# Altium PCB baicuoiki.PcbDoc (part 2 of 2)
Units mm, origin at the board's own origin, x right, y up, seen from the top; angles counter-clockwise.
Board outline 178.82 x 125.98 mm, 2 copper layers (Top Layer, Bottom Layer); 261 components, 166 nets, 718 pads, 50 vias.
Unrouted connection lines stored in the file: 3.
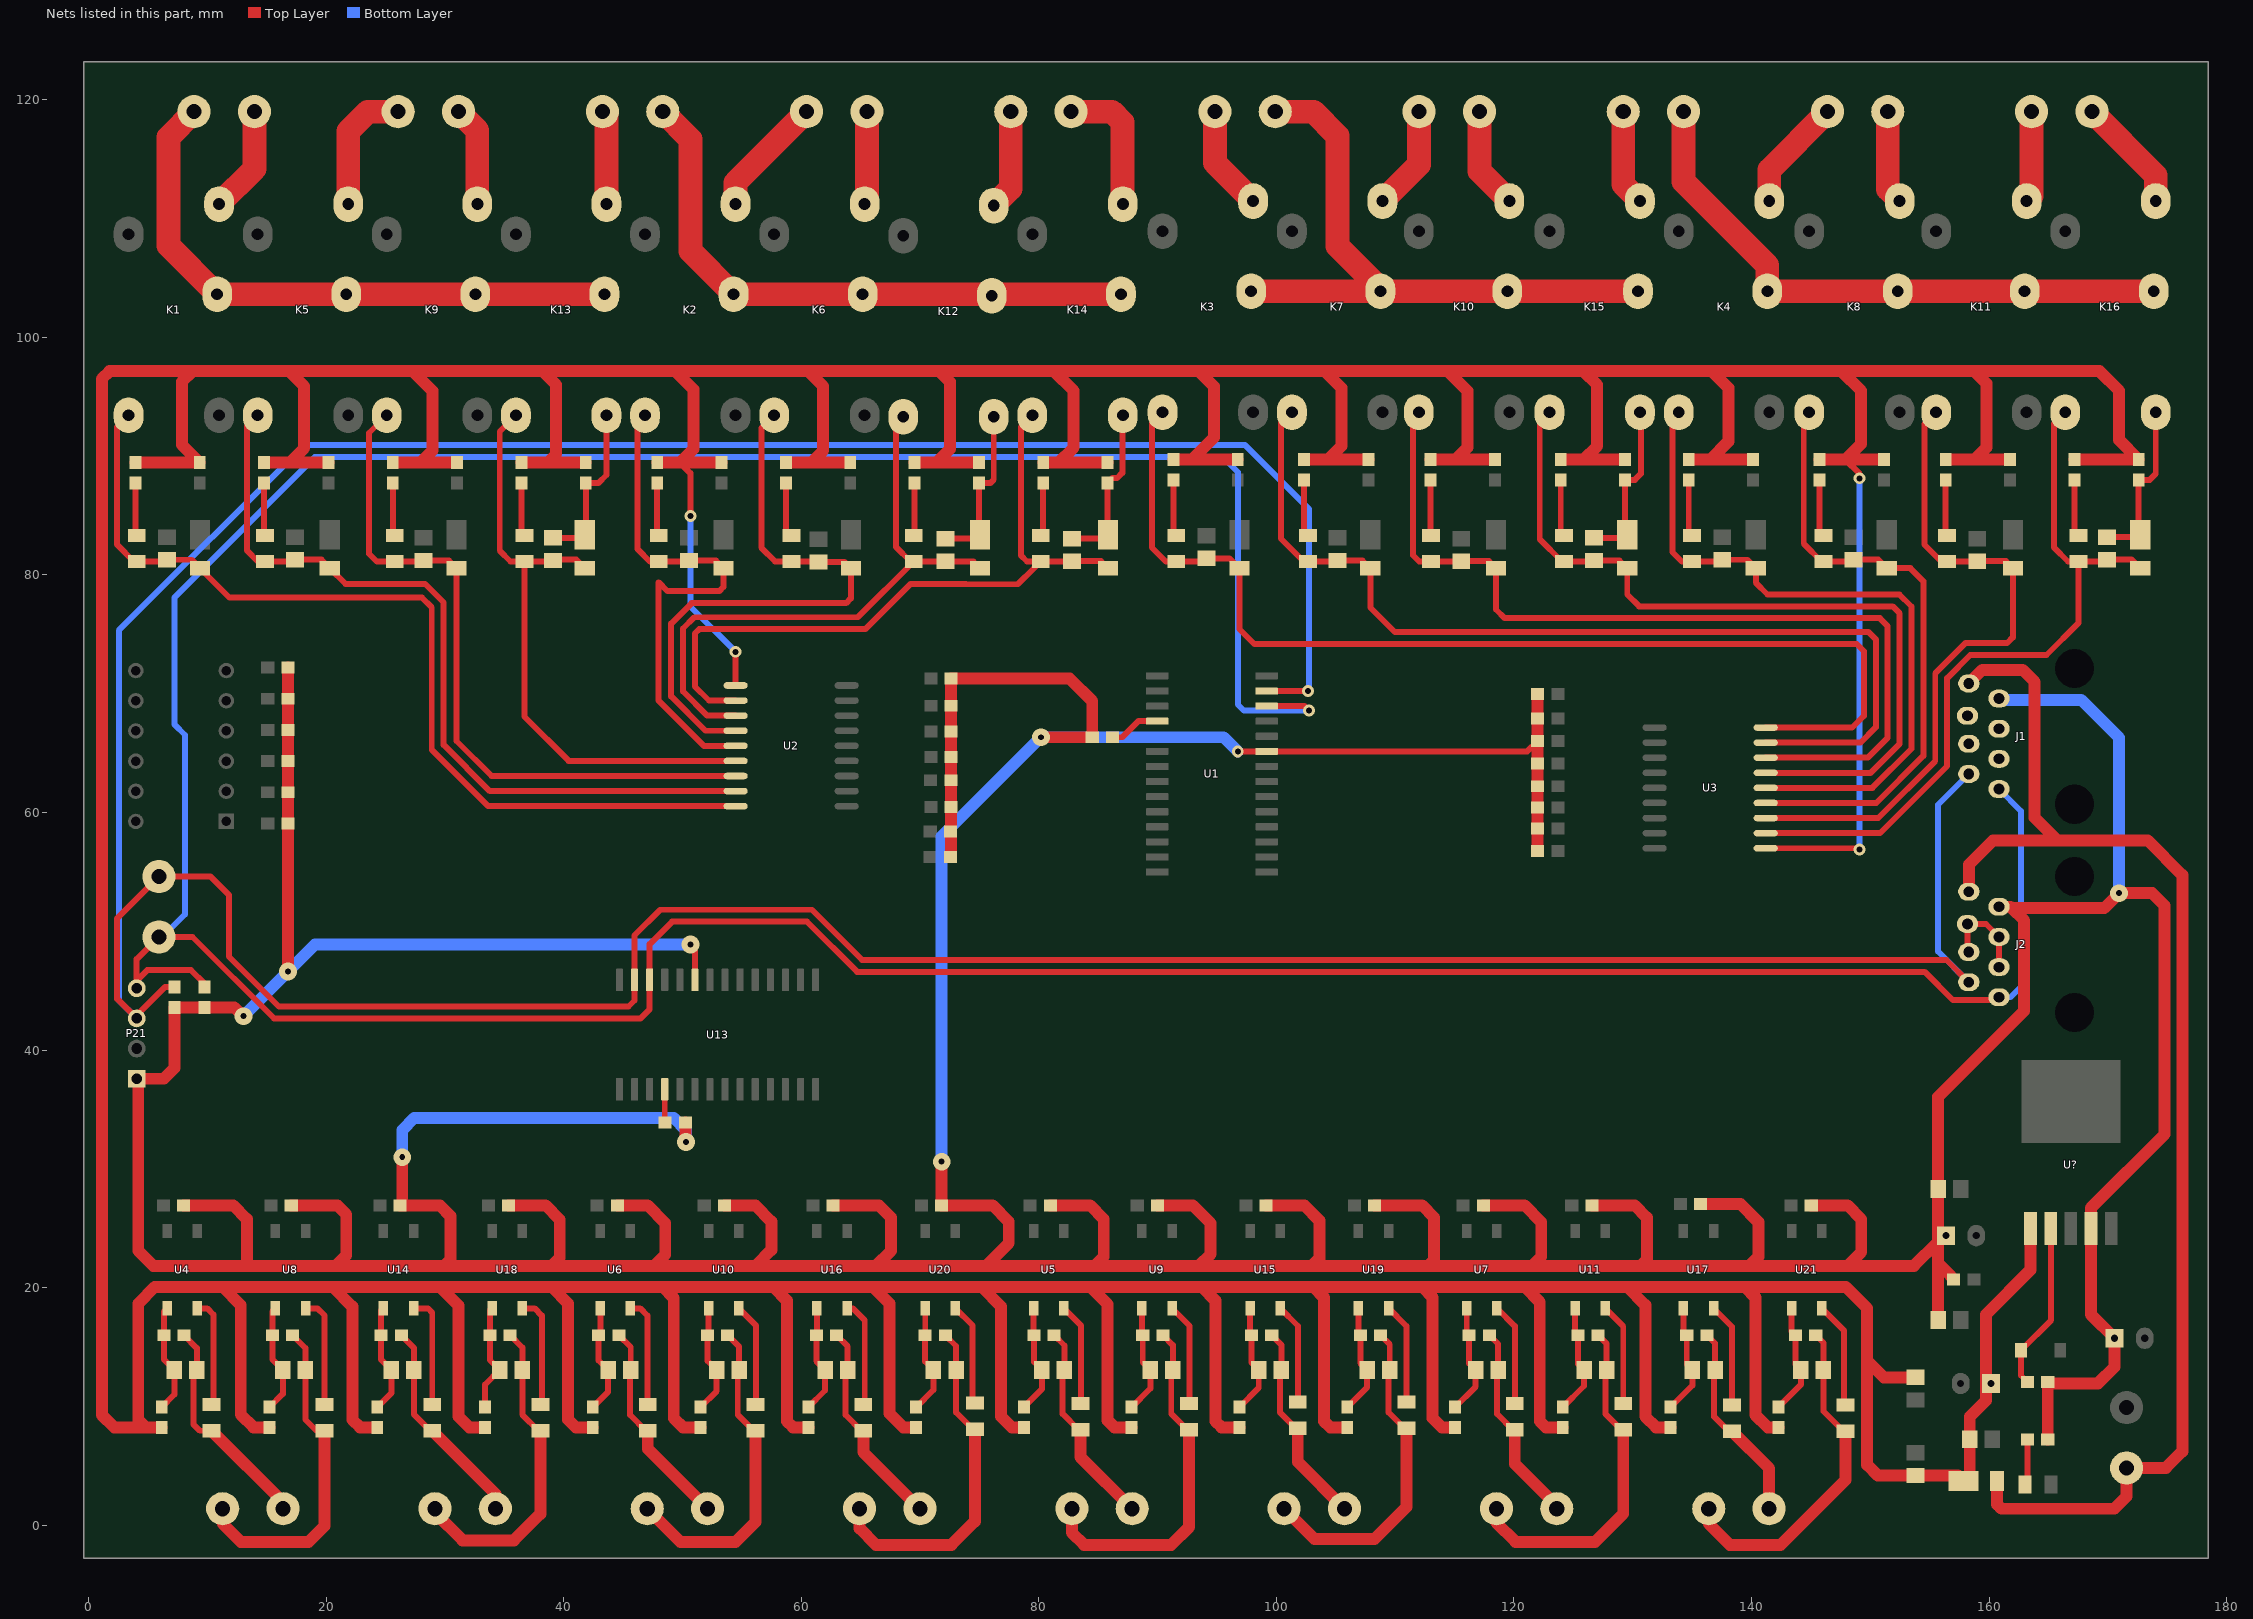
[diagram p2: the nets of this part, all layers, seen from the top]

## Via types
v1: diameter 1, hole 0.5, Top Layer to Bottom Layer, 42 vias
v2: diameter 1.5, hole 0.5, Top Layer to Bottom Layer, 8 vias

## Nets (pads, with @x,y where several pads share a name; then routed paths per layer and width w, separated by ;. In a path a pad name is that pad's centre, name@x,y a point inside that pad or via, vN(x,y) a via of type N, cw(c..) or ccw(c..) an arc to the next point about the centre after c; other vN are vias at no path point) (continued)
NetC12_2: C12.2 D22.2 K12.5 R18.1 | length 14.1
  Top Layer w0.5: C12.2@72.136,83.058 74.718,83.058 D22.2@75.057,83.397 74.959,83.496 R18.1@74.959,87.757 75.946,87.757 76.212,88.023 K12.5@76.212,93.314
NetC13_2: C13.2 D29.2 K13.5 R25.1 | length 14.2
  Top Layer w0.5: C13.2@39.116,83.119 41.505,83.119 D29.2@41.783,83.397 41.869,83.483 R25.1@41.869,87.757 42.949,87.757 43.606,88.414 K13.5@43.606,93.441
NetC14_2: C14.2 D30.2 K14.5 R26.1 | length 13.9
  Top Layer w0.5: C14.2@82.804,83.058 85.407,83.058 85.791,83.441 R26.1@85.791,87.757 86.191,88.157 86.601,88.157 87.041,88.596 87.041,93.441 K14.5@87.08,93.441
NetC15_2: C15.2 D31.2 K15.5 R27.1 | length 14.3
  Top Layer w0.5: C15.2@126.746,83.119 129.262,83.119 D31.2@129.54,83.397 129.356,83.582 R27.1@129.356,88.011 130.175,88.011 130.683,88.519 130.683,93.62 K15.5@130.608,93.695
NetC16_2: C16.2 D32.2 K16.5 R28.1 | length 14.1
  Top Layer w0.5: C16.2@169.926,83.185 172.254,83.185 172.593,83.524 R28.1@172.593,88.011 173.521,88.011 174.029,88.519 K16.5@174.029,93.695
NetC23_2: C23.2 R61.1 R65.1 U4.1 | length 9.2
  Top Layer w0.5: R61.1@6.168,9.942 7.233,11.007 C23.2@7.233,13.081 6.346,13.968 R65.1@6.346,16.002 6.346,17.991 U4.1@6.623,18.268
NetC24_2: C24.2 R62.1 R66.1 U5.1 | length 9.2
  Top Layer w0.5: R62.1@78.748,9.942 80.263,11.457 C24.2@80.263,13.081 79.593,13.751 R66.1@79.593,16.002 79.56,16.036 U5.1@79.56,18.268
NetC25_2: C25.2 R63.1 R69.1 U6.1 | length 9.2
  Top Layer w0.5: R63.1@42.458,9.942 43.753,11.237 C25.2@43.753,13.081 42.956,13.879 R69.1@42.956,16.002 43.091,16.138 U6.1@43.091,18.268
NetC26_2: C26.2 R64.1 R70.1 U7.1 | length 9.4
  Top Layer w0.5: R64.1@115.038,9.942 116.773,11.677 C26.2@116.773,13.081 116.231,13.624 R70.1@116.231,16.002 116.028,16.205 U7.1@116.028,18.268
NetC27_2: C27.2 R74.1 R80.1 U8.1 | length 9.3
  Top Layer w0.5: R74.1@15.241,9.942 16.371,11.072 C27.2@16.371,13.081 15.477,13.974 R80.1@15.477,16.002 15.477,18.005 U8.1@15.74,18.268
NetC28_2: C28.2 R76.1 R81.1 U9.1 | length 9.3
  Top Layer w0.5: R76.1@87.821,9.942 89.391,11.512 C28.2@89.391,13.081 88.753,13.719 R81.1@88.753,16.002 88.677,16.078 U9.1@88.677,18.268
NetC29_2: C29.2 R77.1 R82.1 U10.1 | length 9.2
  Top Layer w0.5: R77.1@51.531,9.942 52.881,11.292 C29.2@52.881,13.081 52.115,13.847 R82.1@52.115,16.002 52.208,16.095 U10.1@52.208,18.268
NetC30_2: C30.2 R78.1 R83.1 U11.1 | length 9.4
  Top Layer w0.5: R78.1@124.111,9.942 125.901,11.732 C30.2@125.901,13.081 125.39,13.592 R83.1@125.39,16.002 125.145,16.247 U11.1@125.145,18.268
NetC34_2: C34.2 R86.1 R92.1 U14.1 | length 9.3
  Top Layer w0.5: R86.1@24.313,9.942 25.498,11.127 C34.2@25.498,13.081 24.637,13.942 R92.1@24.637,16.002 24.637,18.065 U14.1@24.839,18.268
NetC35_2: C35.2 R88.1 R93.1 U15.1 | length 9.3
  Top Layer w0.5: R88.1@96.893,9.942 98.518,11.567 C35.2@98.518,13.081 97.912,13.687 R93.1@97.912,16.002 97.794,16.12 U15.1@97.794,18.268
NetC36_2: C36.2 R90.1 R94.1 U16.1 | length 9.2
  Top Layer w0.5: R90.1@60.603,9.942 62.008,11.347 C36.2@62.008,13.081 61.274,13.815 R94.1@61.274,16.002 61.325,16.053 U16.1@61.325,18.268
NetC37_2: C37.2 R91.1 R95.1 U17.1 | length 9.4
  Top Layer w0.5: R91.1@133.183,9.942 135.029,11.787 C37.2@135.029,13.081 134.55,13.56 R95.1@134.55,16.002 134.262,16.29 U17.1@134.262,18.268
NetC38_2: C38.2 R99.1 R104.1 U18.1 | length 9.3
  Top Layer w0.5: R99.1@33.386,9.942 33.386,11.841 C38.2@34.626,13.081 33.796,13.91 R104.1@33.796,16.002 33.796,18.09 U18.1@33.974,18.268
NetC39_2: C39.2 R101.1 R105.1 U19.1 | length 9.3
  Top Layer w0.5: R101.1@105.966,9.942 107.646,11.622 C39.2@107.646,13.081 107.071,13.655 R105.1@107.071,16.002 106.911,16.163 U19.1@106.911,18.268
NetC40_2: C40.2 R102.1 R106.1 U20.1 | length 9.2
  Top Layer w0.5: R102.1@69.676,9.942 71.136,11.402 C40.2@71.136,13.081 70.434,13.783 R106.1@70.434,16.002 70.443,16.011 U20.1@70.443,18.268
NetC41_2: C41.2 R103.1 R107.1 U21.1 | length 9.4
  Top Layer w0.5: R103.1@142.256,9.942 144.156,11.842 C41.2@144.156,13.081 143.709,13.528 R107.1@143.709,16.002 143.379,16.332 U21.1@143.379,18.268
NetD1_1: D1.1 R2.1 | length 4.5
  Top Layer w0.5: R2.1@3.957,87.757 3.957,83.442 D1.1@4.064,83.335
NetD3_1: D3.1 R6.1 | length 4.5
  Top Layer w0.5: R6.1@47.879,87.757 47.879,83.462 D3.1@48.006,83.335
NetD4_1: D4.1 R7.1 | length 4.8
  Top Layer w0.5: R7.1@91.338,88.011 91.338,83.565 D4.1@91.567,83.335
NetD5_1: D5.1 R8.1 | length 4.8
  Top Layer w0.5: R8.1@134.718,88.011 134.718,83.618 D5.1@135.001,83.335
NetD9_1: D9.1 R13.1 | length 4.5
  Top Layer w0.5: R13.1@14.789,87.757 14.789,83.405 D9.1@14.859,83.335
NetD11_1: D11.1 R14.1 | length 4.6
  Top Layer w0.5: R14.1@58.711,87.757 58.711,83.806 D11.1@59.182,83.335
NetD12_1: D12.1 R15.1 | length 4.8
  Top Layer w0.5: R15.1@102.335,88.011 102.335,83.675 D12.1@102.675,83.335
NetD13_1: D13.1 R16.1 | length 4.8
  Top Layer w0.5: R16.1@145.73,88.011 145.73,83.661 D13.1@146.056,83.335
NetD17_1: D17.1 R21.1 | length 4.5
  Top Layer w0.5: R21.1@25.621,87.757 25.621,83.495 D17.1@25.781,83.335
NetD19_1: D19.1 R22.1 | length 4.5
  Top Layer w0.5: D19.1@69.469,83.335 69.543,83.409 R22.1@69.543,87.757
NetD20_1: D20.1 R23.1 | length 4.7
  Top Layer w0.5: R23.1@112.981,88.011 112.981,83.384 D20.1@113.03,83.335
NetD21_1: D21.1 R24.1 | length 4.7
  Top Layer w0.5: R24.1@156.345,88.011 156.345,83.454 D21.1@156.464,83.335
NetD25_1: D25.1 R29.1 | length 4.5
  Top Layer w0.5: R29.1@36.453,87.757 36.453,83.585 D25.1@36.703,83.335
NetD26_1: D26.1 R30.1 | length 4.5
  Top Layer w0.5: D26.1@80.162,83.335 80.375,83.548 R30.1@80.375,87.757
NetD27_1: D27.1 R31.1 | length 4.8
  Top Layer w0.5: R31.1@123.94,88.011 123.94,83.602 D27.1@124.206,83.335
NetD28_1: D28.1 R32.1 | length 4.8
  Top Layer w0.5: R32.1@167.177,88.011 167.177,83.671 D28.1@167.513,83.335
NetD33_1: D33.1 U4.2 | length 9.3
  Top Layer w0.5: U4.2@9.163,18.268 9.998,18.268 10.533,17.733 10.533,10.16 D33.1@10.359,10.16
NetD34_1: D34.1 U5.2 | length 8.9
  Top Layer w0.5: U5.2@82.1,18.268 83.563,16.804 83.563,10.16 D34.1@83.376,10.16
NetD35_1: D35.1 U6.2 | length 9.2
  Top Layer w0.5: U6.2@45.631,18.268 46.447,18.268 47.062,17.653 47.062,10.184 D35.1@47.086,10.16
NetD36_1: D36.1 U7.2 | length 8.8
  Top Layer w0.5: U7.2@118.568,18.268 120.073,16.762 D36.1@120.073,10.244 D36.1@119.96,10.244
NetD37_1: D37.1 U8.2 | length 9.3
  Top Layer w0.5: U8.2@18.28,18.268 19.269,18.268 19.869,17.668 D37.1@19.869,10.16
NetD38_1: D38.1 U9.2 | length 9
  Top Layer w0.5: U9.2@91.217,18.268 92.691,16.793 92.691,10.16 D38.1@92.449,10.16
NetD39_1: D39.1 U10.2 | length 8.7
  Top Layer w0.5: U10.2@54.748,18.268 56.181,16.835 56.181,10.16 D39.1@56.159,10.16
NetD40_1: D40.1 U11.2 | length 8.9
  Top Layer w0.5: U11.2@127.685,18.268 129.201,16.752 D40.1@129.201,10.244 D40.1@128.977,10.244
NetD42_1: D42.1 R79.1 | length 3.9
  Top Layer w0.5: D42.1@163.027,3.429 163.234,3.636 R79.1@163.234,7.239
NetD43_2: D43.2 L1.1 U?.2 | length 13.3
  Top Layer w0.5: L1.1@163.234,12.065 162.685,12.614 D43.2@162.685,14.732 165.227,17.274 165.227,23.827 U?.2@165.051,24.003
NetD44_1: D44.1 U14.2 | length 9.5
  Top Layer w0.5: U14.2@27.379,18.268 28.581,18.268 28.941,17.907 D44.1@28.941,10.16
NetD45_1: D45.1 U15.2 | length 8.8
  Top Layer w0.5: U15.2@100.334,18.268 101.818,16.783 101.818,10.457 D45.1@101.521,10.16
NetD46_1: D46.1 U16.2 | length 9.1
  Top Layer w0.5: U16.2@63.865,18.268 64.354,18.268 65.35,17.272 65.35,10.279 D46.1@65.231,10.16
NetD47_1: D47.1 U17.2 | length 8.5
  Top Layer w0.5: U17.2@136.802,18.268 138.355,16.714 D47.1@138.355,10.371
NetD48_1: D48.1 U18.2 | length 9.7
  Top Layer w0.5: U18.2@36.514,18.268 37.557,18.268 38.172,17.653 38.172,10.287 37.918,10.287 D48.1@38.045,10.16
NetD49_1: D49.1 U19.2 | length 8.9
  Top Layer w0.5: U19.2@109.451,18.268 110.946,16.772 110.946,10.512 111.01,10.576 D49.1@111.01,10.16
NetD50_1: D50.1 U20.2 | length 8.7
  Top Layer w0.5: U20.2@72.983,18.268 74.436,16.814 D50.1@74.436,10.16
NetD51_1: D51.1 U21.2 | length 9
  Top Layer w0.5: U21.2@145.919,18.268 147.773,16.414 147.773,10.244 D51.1@147.9,10.117
NetJ1_3: J1.3 J1.4 J1.5 J1.6
NetJ2_3: J2.3 J2.4 J2.5 J2.6 | length 8
  Top Layer w0.5: J2.4@158.292,48.26 158.182,48.37 J2.6@158.182,50.62 159.742,50.62 J2.5@160.832,49.53 J2.3@160.832,46.99
RELAY1: C1.1 D1.2 D2.1 K1.1 U2.18 | length 79.6
  Top Layer w0.5: K1.1@3.38,93.441 2.413,92.474 2.413,82.55 3.828,81.135 D1.2@4.064,81.135 6.459,81.135 C1.1@6.604,81.28 8.686,81.28 D2.1@9.398,80.568 11.861,78.105 28.067,78.105 28.901,77.271 28.901,65.287 33.651,60.536 U2.18@54.481,60.536
RELAY2: C5.1 D9.2 D10.1 K5.1 U2.17 | length 68.4
  Top Layer w0.5: K5.1@14.249,93.441 13.359,92.551 13.359,82.042 14.266,81.135 D9.2@14.859,81.135 17.249,81.135 C5.1@17.399,81.285 19.603,81.285 D10.1@20.32,80.568 21.64,79.248 28.338,79.248 29.9,77.686 29.9,65.701 33.795,61.806 U2.17@54.481,61.806
RELAY3: C9.1 D17.2 D18.1 K9.1 U2.16 | length 59.5
  Top Layer w0.5: K9.1@25.117,93.441 23.622,91.945 23.622,81.788 24.275,81.135 D17.2@25.781,81.135 28.11,81.135 C9.1@28.194,81.219 30.337,81.219 D18.1@30.988,80.568 30.988,66.028 33.94,63.076 U2.16@54.481,63.076
RELAY4: C13.1 D25.2 D29.1 K13.1 U2.15 | length 52.2
  Top Layer w0.5: K13.1@35.986,93.441 34.626,92.08 34.626,82.042 35.532,81.135 D25.2@36.703,81.135 ; D29.1@41.783,80.568 41.066,81.285 39.243,81.285 39.093,81.135 D25.2@36.703,81.135 ; U2.15@54.481,64.346 40.429,64.346 36.703,68.072 D25.2@36.703,81.135
RELAY5: C2.1 D3.2 D6.1 K2.1 U2.14 | length 45
  Top Layer w0.5: K2.1@46.854,93.441 46.228,92.814 46.228,82.169 47.262,81.135 D3.2@48.006,81.135 50.462,81.135 C2.1@50.546,81.219 52.816,81.219 D6.1@53.467,80.568 53.467,78.994 53.106,78.633 48.748,78.633 48.006,79.375 48.006,69.417 51.807,65.616 U2.14@54.481,65.616
RELAY6: C6.1 D11.2 D14.1 K6.1 U2.13 | length 50.9
  Top Layer w0.5: U2.13@54.481,66.886 51.951,66.886 49.054,69.784 49.054,75.901 50.786,77.633 63.79,77.633 64.186,78.029 D14.1@64.186,80.568 63.662,81.092 C6.1@61.468,81.092 61.425,81.135 D11.2@59.182,81.135 ; K6.1@57.723,93.441 56.642,92.36 56.642,82.296 57.803,81.135 D11.2@58.928,81.135
RELAY7: C12.1 D19.2 D22.1 K12.1 U2.12 | length 51.4
  Top Layer w0.5: U2.12@54.481,68.156 52.095,68.156 50.054,70.198 50.054,75.487 51.005,76.438 64.772,76.438 D19.2@69.469,81.135 ; K12.1@68.592,93.314 67.969,92.691 67.969,82.372 69.205,81.135 D19.2@69.469,81.135 ; D22.1@75.057,80.568 74.49,81.135 D19.2@69.469,81.135
RELAY8: C14.1 D26.2 D30.1 K14.1 U2.11 | length 60
  Top Layer w0.5: U2.11@54.481,69.426 52.24,69.426 51.054,70.612 51.054,75.073 51.419,75.438 65.405,75.438 69.215,79.248 73.866,79.248 73.896,79.218 78.245,79.218 79.595,80.568 D26.2@80.162,81.135 ; K14.1@79.46,93.441 78.486,92.466 78.486,81.661 79.012,81.135 D26.2@80.162,81.135 ; D30.1@85.834,80.568 85.244,81.158 C14.1@82.804,81.158 82.781,81.135 D26.2@80.162,81.135
RELAY9: C3.1 D4.2 D7.1 K3.1 U3.18 | length 92.7
  Top Layer w0.5: K3.1@90.422,93.695 89.535,92.807 89.535,82.296 90.696,81.135 D4.2@91.567,81.135 93.83,81.135 C3.1@94.107,81.412 94.107,81.397 96.056,81.397 96.893,80.56 96.893,75.438 98.147,74.184 148.86,74.184 149.464,73.58 149.464,68.146 148.474,67.156 U3.18@141.195,67.156
RELAY10: C7.1 D12.2 D15.1 K7.1 U3.17 | length 83.8
  Top Layer w0.5: K7.1@101.31,93.695 100.389,92.774 100.389,83.058 102.312,81.135 D12.2@102.675,81.135 105.076,81.135 C7.1@105.16,81.219 107.257,81.219 D15.1@107.908,80.568 107.908,77.258 109.982,75.184 149.86,75.184 150.464,74.58 150.464,67.183 149.167,65.886 U3.17@141.195,65.886
RELAY11: C10.1 D20.2 D23.1 K10.1 U3.16 | length 77.1
  Top Layer w0.5: K10.1@111.992,93.695 111.506,93.208 111.506,81.661 112.032,81.135 D20.2@113.03,81.135 115.547,81.135 C10.1@115.57,81.158 117.901,81.158 D23.1@118.491,80.568 118.491,77.089 119.221,76.359 150.797,76.359 151.464,75.692 151.464,66.294 149.786,64.616 U3.16@141.195,64.616
RELAY12: C15.1 D27.2 D31.1 K15.1 U3.15 | length 68.5
  Top Layer w0.5: K15.1@122.988,93.695 122.174,92.881 122.174,83.007 124.045,81.135 D27.2@124.206,81.135 126.662,81.135 C15.1@126.746,81.219 128.889,81.219 D31.1@129.54,80.568 129.54,78.359 130.54,77.359 151.876,77.359 152.464,76.771 152.464,65.786 150.024,63.346 U3.15@141.195,63.346
RELAY13: C4.1 D5.2 D8.1 K4.1 U3.14 | length 60.4
  Top Layer w0.5: K4.1@133.877,93.695 133.35,93.168 133.35,81.915 134.13,81.135 D5.2@135.001,81.135 137.396,81.135 C4.1@137.541,81.28 139.648,81.28 D8.1@140.36,80.568 140.36,79.35 141.351,78.359 152.448,78.359 153.464,77.343 153.464,65.372 150.169,62.076 U3.14@141.195,62.076
RELAY14: C8.1 D13.2 D16.1 K8.1 U3.13 | length 52.4
  Top Layer w0.5: U3.13@141.195,60.806 150.5,60.806 154.464,64.77 154.464,79.47 153.366,80.568 D16.1@151.384,80.568 150.667,81.285 C8.1@148.59,81.285 148.44,81.135 D13.2@146.056,81.135 145.895,81.135 144.399,82.632 144.399,93.242 K8.1@144.852,93.695
RELAY15: C11.1 D21.2 D24.1 K11.1 U3.12 | length 57.1
  Top Layer w0.5: U3.12@141.195,59.536 150.67,59.536 155.464,64.33 155.464,71.724 157.999,74.259 161.508,74.259 162.001,74.752 D24.1@162.001,80.568 161.411,81.158 C11.1@159.004,81.158 158.981,81.135 D21.2@156.464,81.135 155.974,81.135 154.559,82.55 154.559,92.713 K11.1@155.54,93.695
RELAY16: C16.1 D28.2 D32.1 K16.1 U3.11 | length 63
  Top Layer w0.5: U3.11@141.195,58.266 141.201,58.273 147.838,58.273 147.844,58.266 150.814,58.266 156.464,63.916 156.464,71.309 158.414,73.259 164.826,73.259 167.513,75.946 D28.2@167.513,81.135 ; K16.1@166.409,93.695 165.481,92.767 165.481,82.296 166.642,81.135 D28.2@167.513,81.135 ; D32.1@172.72,80.568 172.003,81.285 C16.1@169.926,81.285 169.776,81.135 D28.2@167.513,81.135
RESET: R49.2 U13.18 | length 3.1
  Top Layer w0.5: R49.2@48.514,33.834 U13.18@48.514,36.921
RESET0: R56.2 U1.18 | length 4.3
  Top Layer w0.5: R56.2@86.2,66.338 87.029,66.338 88.382,67.691 U1.18@89.977,67.691
SCL: J1.1 J2.1 P1.2 P21.4 R68.2 U1.12 U13.12 | length 353.3
  Top Layer w0.5: P21.4@4.064,45.212 P21.4@4.064,45.847 ; R68.2@9.779,45.3 9.779,45.593 8.636,46.736 4.953,46.736 P21.4@4.064,45.847 ; U1.12@99.187,68.961 102.382,68.961 v1(102.763,68.58) ; J2.1@160.832,44.45 160.832,44.22 156.948,44.22 154.574,46.594 64.716,46.594 60.494,50.816 49.133,50.816 47.244,48.927 U13.12@47.244,45.913 47.244,43.434 46.482,42.672 15.621,42.672 8.763,49.53 P1.2@5.93,49.53 4.064,47.664 P21.4@4.064,45.847
  Bottom Layer w0.5: P1.2@5.93,49.53 6.223,49.53 8.128,51.435 8.128,66.531 7.255,67.404 7.255,78.121 19.05,89.916 95.504,89.916 96.774,88.646 96.774,69.088 97.282,68.58 v1(102.763,68.58) ; J2.1@160.832,44.45 161.798,44.45 162.687,45.339 162.687,60.121 J1.1@160.832,61.976
SDA: J1.2 J2.2 P1.1 P21.3 R67.2 U1.13 U13.13 | length 368.2
  Top Layer w0.5: R67.2@7.239,45.3 6.438,45.3 4.064,42.926 P21.3@4.064,42.672 2.413,44.323 2.413,51.093 P1.1@5.93,54.61 10.287,54.61 11.82,53.077 11.82,47.888 16.035,43.672 45.466,43.672 45.974,44.18 U13.13@45.974,45.913 45.974,49.657 48.133,51.816 60.908,51.816 65.13,47.594 156.418,47.594 J2.2@158.292,45.72 ; U1.13@99.187,70.231 v1(102.675,70.231)
  Bottom Layer w0.5: P21.3@4.064,42.672 2.564,44.172 2.564,75.335 18.161,90.932 97.372,90.932 102.763,85.541 102.763,70.319 v1(102.675,70.231) ; J2.2@158.292,45.72 155.702,48.31 155.702,60.656 J1.2@158.292,63.246
"VCC 5V": C17.1 C18.1 C21.1 C22.1 C33.1 J1.7 J2.7 L1.2 P21.1 R33.1 R34.1 R35.1 R36.1 R37.1 R38.1 R39.1 R40.1 R41.1 R42.1 R43.1 R44.1 R45.1 R46.1 R47.1 R48.1 R49.1 R50.1 R51.1 R52.1 R53.1 R54.1 R55.1 R56.1 R57.1 R58.1 R59.1 R60.1 R67.1 R68.1 R71.1 R72.1 R73.1 R75.1 R79.2 R84.1 R85.1 R87.1 R89.1 R96.1 R97.1 R98.1 R100.1 U1.9 U13.9 U?.4 | length 700.3
  Top Layer w0.5: U13.9@51.054,45.913 v2@51.054,48.34 ; v1(96.754,65.151) U1.9@99.187,65.151 121.119,65.151 R42.1@121.996,66.028
  Top Layer w1: R57.1@8.018,26.924 12.192,26.924 13.335,25.781 13.335,21.844 ; v2(13.048,42.859) 13.021,42.859 12.28,43.6 R68.1@9.779,43.6 R67.1@7.239,43.6 7.239,38.481 6.35,37.592 P21.1@4.064,37.592 4.191,37.465 4.191,23.114 5.461,21.844 13.335,21.844 ; v2(16.798,46.609) R50.1@16.798,59.081 R51.1@16.798,61.706 R52.1@16.798,64.33 R53.1@16.798,66.955 R54.1@16.798,69.58 R55.1@16.798,72.204 ; R71.1@17.072,26.924 20.955,26.924 21.705,26.174 21.705,22.721 20.828,21.844 ; v2(26.416,30.988) 26.416,27.106 R84.1@26.234,26.924 29.591,26.924 30.48,26.035 30.48,22.352 29.972,21.844 ; R96.1@35.378,26.924 38.481,26.924 39.672,25.733 39.672,22.518 38.999,21.844 ; R59.1@44.522,26.924 47.075,26.924 48.553,25.446 48.553,22.772 47.625,21.844 ; R49.1@50.253,33.909 50.253,32.297 v2(50.292,32.258) ; R73.1@53.539,26.924 56.147,26.924 57.498,25.572 57.498,23.183 56.159,21.844 ; R87.1@62.683,26.924 66.548,26.924 67.564,25.908 67.564,23.114 66.294,21.844 ; v2(71.827,30.607) R98.1@71.827,26.924 76.118,26.924 77.47,25.572 77.47,23.749 75.565,21.844 ; R36.1@72.564,56.245 72.611,56.292 R34.1@72.611,60.483 R40.1@72.611,64.674 R39.1@72.611,66.833 R38.1@72.611,68.992 R37.1@72.611,71.278 82.613,71.278 84.5,69.391 R56.1@84.5,66.338 v2(80.179,66.338) ; R58.1@80.971,26.924 84.328,26.924 85.471,25.781 85.471,22.612 84.703,21.844 ; R72.1@89.988,26.924 92.964,26.924 94.464,25.424 94.464,22.836 93.472,21.844 ; R85.1@99.132,26.924 102.362,26.924 103.632,25.654 103.632,22.479 102.997,21.844 ; R97.1@108.276,26.924 112.268,26.924 113.284,25.908 113.284,22.352 112.776,21.844 ; R60.1@117.42,26.924 120.904,26.924 122.301,25.527 122.301,22.606 121.539,21.844 130.683,21.844 ; 121.412,21.844 112.776,21.844 ; R45.1@121.996,56.757 R46.1@121.996,58.662 R47.1@121.996,60.44 R48.1@121.996,62.218 R41.1@121.996,64.123 R42.1@121.996,66.028 R43.1@121.996,67.933 R44.1@121.996,69.965 ; R75.1@126.564,26.924 130.175,26.924 131.191,25.908 131.191,22.352 130.683,21.844 ; R89.1@135.708,27.051 139.065,27.051 140.589,25.527 140.589,22.606 139.827,21.844 ; R100.1@145.028,26.924 148.082,26.924 149.239,25.767 149.239,23.001 148.082,21.844 ; C17.1@155.707,17.272 155.707,22.044 ; C18.1@156.796,20.955 155.707,22.044 ; J2.7@160.832,52.07 161.798,52.07 161.908,51.96 ; R79.2@164.934,7.239 L1.2@164.934,12.065 165.061,11.938 169.164,11.938 170.561,13.335 C33.1@170.561,15.748 168.578,17.731 U?.4@168.578,24.987 168.578,26.719 174.776,32.917 174.776,52.173 173.736,53.213 v2(170.942,53.213) 169.689,51.96 161.908,51.96 ; 13.335,21.844 20.828,21.844 ; 20.828,21.844 29.972,21.844 ; 29.972,21.844 38.999,21.844 ; 38.999,21.844 47.625,21.844 ; 47.625,21.844 56.159,21.844 ; 56.159,21.844 66.294,21.844 ; 66.294,21.844 75.565,21.844 ; 75.565,21.844 84.703,21.844 ; 84.703,21.844 93.472,21.844 ; 93.472,21.844 102.997,21.844 ; 102.997,21.844 112.776,21.844 ; 130.683,21.844 139.827,21.844 ; 139.827,21.844 148.082,21.844 ; 148.082,21.844 153.675,21.844 C21.1@155.707,23.876 ; 155.707,22.044 C21.1@155.707,23.876 ; C21.1@155.707,23.876 C22.1@155.707,28.321 155.707,36.073 162.941,43.307 162.941,50.927 161.908,51.96
  Bottom Layer w1: v2(13.048,42.859) v2(16.798,46.609) 19.084,48.895 v2(50.673,48.895) ; v2(26.416,30.988) 26.416,33.274 27.432,34.29 49.276,34.29 50.292,33.274 v2(50.292,32.258) ; v2(71.827,30.607) 71.827,57.986 v2(80.179,66.338) 95.566,66.338 v1(96.754,65.151) ; J1.7@160.832,69.596 160.832,69.486 167.75,69.486 170.942,66.294 v2(170.942,53.213)
"VCC 24V": C19.1 C20.1 C31.1 C32.2 D41.2 R1.2 R2.2 R3.2 R4.2 R5.2 R6.2 R7.2 R8.2 R9.2 R10.2 R11.2 R12.2 R13.2 R14.2 R15.2 R16.2 R17.2 R18.2 R19.2 R20.2 R21.2 R22.2 R23.2 R24.2 R25.2 R26.2 R27.2 R28.2 R29.2 R30.2 R31.2 R32.2 R61.2 R62.2 R63.2 R64.2 R74.2 R76.2 R77.2 R78.2 R86.2 R88.2 R90.2 R91.2 R99.2 R101.2 R102.2 R103.2 U2.10 U3.10 U?.1 | length 965.3
  Top Layer w0.5: 49.784,89.457 50.673,88.568 v1(50.673,84.963) ; U2.10@54.481,70.696 54.483,70.698 v1(54.483,73.533) ; U3.10@141.195,56.996 149.198,56.996 v1(149.098,56.896) ; 147.9,89.711 149.098,88.513 v1(149.098,88.138)
  Top Layer w1: R2.2@3.957,89.457 R1.2@9.373,89.457 7.874,90.956 7.874,96.266 8.763,97.155 ; R61.2@6.168,8.242 4.839,8.242 ; R13.2@14.789,89.457 16.94,89.457 ; R74.2@15.241,8.242 13.904,8.242 12.827,9.319 12.827,18.542 11.303,20.066 ; R9.2@20.205,89.457 16.94,89.457 ; R86.2@24.313,8.242 22.873,8.242 22.225,8.89 22.225,18.415 20.574,20.066 ; R21.2@25.621,89.457 27.94,89.457 ; R17.2@31.037,89.457 27.94,89.457 ; R99.2@33.386,8.242 32.06,8.242 31.157,9.144 31.157,18.5 29.591,20.066 ; R29.2@36.453,89.457 38.657,89.457 ; R25.2@41.869,89.457 38.657,89.457 ; R63.2@42.458,8.242 41.034,8.242 40.386,8.89 40.386,18.669 38.989,20.066 ; R6.2@47.879,89.457 49.784,89.457 ; R77.2@51.531,8.242 50.051,8.242 49.276,9.017 49.276,19.135 48.345,20.066 ; R3.2@53.295,89.457 49.784,89.457 ; R14.2@58.711,89.457 60.833,89.457 ; R90.2@60.603,8.242 59.322,8.242 58.801,8.763 58.801,18.923 57.658,20.066 ; R10.2@64.127,89.457 60.833,89.457 ; R22.2@69.543,89.457 71.374,89.457 ; R102.2@69.676,8.242 68.593,8.242 67.437,9.398 67.437,18.669 66.04,20.066 ; R18.2@74.959,89.457 71.374,89.457 ; R62.2@78.748,8.242 77.737,8.242 76.835,9.144 76.835,18.415 75.184,20.066 ; R30.2@80.375,89.457 81.661,89.457 ; R26.2@85.791,89.457 81.661,89.457 ; R76.2@87.821,8.242 86.373,8.242 85.791,8.824 85.791,18.603 84.328,20.066 ; R7.2@91.338,89.711 92.886,89.711 ; R4.2@96.754,89.711 92.886,89.711 ; R88.2@96.893,8.242 95.39,8.242 94.869,8.763 94.869,18.923 93.726,20.066 ; R15.2@102.335,89.711 104.326,89.711 ; R101.2@105.966,8.242 104.534,8.242 104.013,8.763 104.013,19.177 103.124,20.066 ; R11.2@107.751,89.711 104.326,89.711 ; R23.2@112.981,89.711 115.062,89.711 ; R64.2@115.038,8.242 113.932,8.242 113.157,9.017 113.157,19.177 112.268,20.066 ; R19.2@118.397,89.711 115.062,89.711 ; R31.2@123.94,89.711 125.857,89.711 ; R78.2@124.111,8.242 122.695,8.242 122.174,8.763 122.174,18.796 120.904,20.066 ; R27.2@129.356,89.711 125.857,89.711 ; R91.2@133.183,8.242 131.966,8.242 131.064,9.144 131.064,18.542 129.54,20.066 ; R8.2@134.718,89.711 136.525,89.711 ; R5.2@140.134,89.711 136.525,89.711 ; R103.2@142.256,8.242 141.364,8.242 140.335,9.271 140.335,19.177 139.446,20.066 ; R16.2@145.73,89.711 147.9,89.711 ; R12.2@151.146,89.711 147.9,89.711 ; C19.1@153.797,12.446 151.13,12.446 149.733,13.843 ; R24.2@156.345,89.711 158.75,89.711 ; R20.2@161.761,89.711 158.75,89.711 ; U?.1@163.478,24.987 163.478,21.492 159.727,17.741 159.727,10.502 158.374,9.149 C32.2@158.374,7.239 158.374,4.265 D41.2@157.843,3.734 157.387,4.191 C20.1@153.797,4.191 150.622,4.191 149.733,5.08 149.733,13.843 ; R32.2@167.177,89.711 R28.2@172.593,89.711 170.942,91.362 170.942,95.504 169.291,97.155 158.75,97.155 ; 4.839,8.242 2.172,8.242 1.13,9.284 1.13,82.065 1.13,96.507 1.778,97.155 8.763,97.155 ; 4.839,8.242 4.191,8.89 4.191,18.669 5.588,20.066 11.303,20.066 ; 8.763,97.155 16.891,97.155 ; 11.303,20.066 20.574,20.066 ; 16.891,97.155 27.305,97.155 ; 16.891,97.155 18.161,95.885 18.161,90.678 16.94,89.457 ; 20.574,20.066 29.591,20.066 ; 27.305,97.155 38.227,97.155 ; 27.305,97.155 28.956,95.504 28.956,90.473 27.94,89.457 ; 29.591,20.066 38.989,20.066 ; 38.227,97.155 49.403,97.155 ; 38.227,97.155 39.37,96.012 39.37,90.17 38.657,89.457 ; 38.989,20.066 48.345,20.066 ; 48.345,20.066 57.658,20.066 ; 49.403,97.155 60.579,97.155 ; 49.403,97.155 50.927,95.631 50.927,90.6 49.784,89.457 ; 57.658,20.066 66.04,20.066 ; 60.579,97.155 71.628,97.155 ; 60.579,97.155 61.849,95.885 61.849,90.473 60.833,89.457 ; 66.04,20.066 75.184,20.066 ; 71.374,89.457 72.517,90.6 72.517,96.266 71.628,97.155 ; 71.628,97.155 81.28,97.155 ; 75.184,20.066 84.328,20.066 ; 81.28,97.155 93.472,97.155 ; 81.28,97.155 82.931,95.504 82.931,90.727 81.661,89.457 ; 84.328,20.066 93.726,20.066 ; 92.886,89.711 94.742,91.567 94.742,95.885 93.472,97.155 ; 93.472,97.155 104.072,97.155 ; 93.726,20.066 103.124,20.066 ; 103.124,20.066 112.268,20.066 ; 104.072,97.155 114.427,97.155 ; 104.072,97.155 105.469,95.758 105.469,90.854 104.326,89.711 ; 112.268,20.066 120.904,20.066 ; 114.427,97.155 125.857,97.155 ; 114.427,97.155 116.078,95.504 116.078,90.727 115.062,89.711 ; 120.904,20.066 129.54,20.066 ; 125.857,89.711 127,90.854 127,96.012 125.857,97.155 ; 125.857,97.155 136.652,97.155 ; 129.54,20.066 139.446,20.066 ; 136.525,89.711 138.049,91.235 138.049,95.758 136.652,97.155 ; 136.652,97.155 147.574,97.155 ; 139.446,20.066 147.935,20.066 149.733,18.268 149.733,13.843 ; 147.574,97.155 158.75,97.155 ; 147.574,97.155 149.225,95.504 149.225,91.036 147.9,89.711 ; 158.75,89.711 159.766,90.727 159.766,96.139 158.75,97.155
  Bottom Layer w0.5: v1(50.673,84.963) 50.673,77.343 v1(54.483,73.533) ; v1(149.098,56.896) v1(149.098,88.138)
"VCC IN": D41.1 J1.8 J2.8 P18.1 | length 112.5
  Top Layer w1: J2.8@158.292,53.34 158.292,55.617 160.333,57.658 165.735,57.658 ; J1.8@158.292,70.866 159.435,72.009 162.814,72.009 163.83,70.993 163.83,59.563 165.735,57.658 ; D41.1@160.673,3.734 160.673,1.76 161.036,1.397 170.543,1.397 171.577,2.431 P18.1@171.577,4.826 174.879,4.826 176.276,6.223 176.276,54.737 173.355,57.658 165.735,57.658
X1A: K1.4 K5.4 K9.4 K13.4 P3.2 | length 50.6
  Top Layer w2: P3.2@8.89,118.999 6.731,116.84 6.731,107.735 K1.4@10.834,103.632 K5.4@21.703,103.632 K9.4@32.571,103.632 K13.4@43.44,103.632
X1B: K1.3 P3.1 | length 9
  Top Layer w2: K1.3@11,111.221 13.97,114.191 P3.1@13.97,118.999
X2A: K5.3 P7.2 | length 11
  Top Layer w2: K5.3@21.869,111.221 21.869,117.348 23.52,118.999 P7.2@26.077,118.999
X2B: K9.3 P7.1 | length 8.4
  Top Layer w2: P7.1@31.157,118.999 32.737,117.419 K9.3@32.737,111.221
X3A: K13.3 P11.2 | length 8.4
  Top Layer w1: K13.3@43.265,111.562 K13.3@43.606,111.221
  Top Layer w2: P11.2@43.265,118.999 43.606,118.658 K13.3@43.606,111.221
X3B: K2.4 K6.4 K12.4 K14.4 P11.1 | length 50.4
  Top Layer w2: P11.1@48.345,118.999 50.673,116.671 50.673,107.268 K2.4@54.309,103.632 K6.4@65.177,103.632 K14.4@86.914,103.632
X4A: K2.3 P15.2 | length 10.3
  Top Layer w2: K2.3@54.474,111.221 54.474,113.021 P15.2@60.452,118.999
X4B: K6.3 P15.1 | length 7.9
  Top Layer w2: K6.3@65.343,111.221 65.532,111.41 P15.1@65.532,118.999
X5A: K12.3 P19.2 | length 8.5
  Top Layer w2: K12.3@76.212,111.094 77.639,112.521 P19.2@77.639,118.999
X5B: K14.3 P19.1 | length 11.6
  Top Layer w2: P19.1@82.719,118.999 86.152,118.999 87.041,118.11 87.041,111.26 K14.3@87.08,111.221
X6A: K3.4 K7.4 K10.4 K15.4 P4.1 | length 53.2
  Top Layer w2: K3.4@97.877,103.886 K7.4@108.764,103.886 ; P4.1@99.907,118.999 103.124,118.999 105.156,116.967 105.156,107.696 108.764,104.088 K7.4@108.764,103.886 ; K15.4@130.442,103.886 K10.4@119.446,103.886 K7.4@108.764,103.886
X6B: K3.3 P4.2 | length 8.9
  Top Layer w2: P4.2@94.827,118.999 94.827,114.69 K3.3@98.042,111.475
X7A: K7.3 P8.2 | length 8.8
  Top Layer w2: K7.3@108.93,111.475 112.014,114.558 P8.2@112.014,118.999
X7B: K10.3 P8.1 | length 8.6
  Top Layer w2: P8.1@117.094,118.999 117.094,113.993 K10.3@119.612,111.475
X8A: K15.3 P12.2 | length 8.1
  Top Layer w2: P12.2@129.201,118.999 129.201,112.881 K15.3@130.608,111.475
X8B: K4.4 K8.4 K11.4 K16.4 P12.1 | length 50.6
  Top Layer w2: P12.1@134.281,118.999 134.281,113.115 141.331,106.065 K4.4@141.331,103.886 K8.4@152.306,103.886 K11.4@162.994,103.886 K16.4@173.863,103.886
X9A: K4.3 P16.2 | length 9.6
  Top Layer w2: K4.3@141.497,111.475 141.497,114.107 P16.2@146.389,118.999
X9B: K8.3 P16.1 | length 7.9
  Top Layer w2: P16.1@151.469,118.999 151.469,112.478 K8.3@152.472,111.475
X10A: K11.3 P20.2 | length 8.3
  Top Layer w1: P20.2@163.16,118.583 P20.2@163.576,118.999
  Top Layer w2: K11.3@163.16,111.475 163.576,111.89 P20.2@163.576,118.999
X10B: K16.3 P20.1 | length 9.7
  Top Layer w2: P20.1@168.656,118.999 174.029,113.626 K16.3@174.029,111.475
X12A: C27.1 D37.2 P5.1 R80.2 | length 28.6
  Top Layer w0.5: R80.2@17.177,16.002 18.271,14.909 C27.1@18.271,13.081 18.271,8.89 19.201,7.96 D37.2@19.869,7.96
  Top Layer w1: P5.1@11.303,1.397 11.303,0.127 12.827,-1.397 18.542,-1.397 19.869,-0.07 D37.2@19.869,7.96
X12B: C23.1 D33.2 P5.2 R65.2 | length 18.9
  Top Layer w0.5: R65.2@8.046,16.002 9.133,14.915 C23.1@9.133,13.081 8.835,12.783 8.835,8.509 9.384,7.96 D33.2@10.359,7.96
  Top Layer w1: D33.2@10.359,7.96 16.383,1.936 P5.2@16.383,1.397
X13A: C38.1 D48.2 P9.1 R104.2 | length 27.1
  Top Layer w0.5: R104.2@35.496,16.002 36.526,14.973 C38.1@36.526,13.081 36.526,9.319 D48.2@37.884,7.96
  Top Layer w1: P9.1@29.174,1.397 29.174,1.052 31.496,-1.27 35.814,-1.27 38.045,0.961 D48.2@38.045,7.96
X13B: C34.1 D44.2 P9.2 R92.2 | length 18
  Top Layer w0.5: R92.2@26.337,16.002 27.398,14.941 C34.1@27.398,13.081 27.398,9.342 28.781,7.96 D44.2@28.941,7.96
  Top Layer w1: D44.2@28.941,7.96 34.254,2.647 P9.2@34.254,1.397
X14A: C29.1 D39.2 P13.1 R82.2 | length 27.7
  Top Layer w0.5: R82.2@53.815,16.002 54.781,15.036 C29.1@54.781,13.081 54.659,12.959 54.659,9.299 D39.2@55.998,7.96
  Top Layer w1: P13.1@47.044,1.397 49.838,-1.397 54.474,-1.397 56.159,0.287 D39.2@56.159,7.96
X14B: C25.1 D35.2 P13.2 R69.2 | length 17.8
  Top Layer w0.5: R69.2@44.656,16.002 45.653,15.004 C25.1@45.653,13.081 45.586,13.014 45.586,9.299 46.926,7.96 D35.2@47.086,7.96
  Top Layer w1: D35.2@47.086,7.96 47.086,6.435 P13.2@52.124,1.397
X15A: C40.1 D50.2 P17.1 R106.2 | length 29.6
  Top Layer w0.5: R106.2@72.134,16.002 73.036,15.1 C40.1@73.036,13.081 73.036,9.512 74.46,8.087 D50.2@74.621,8.087
  Top Layer w1: P17.1@64.915,1.397 64.915,-0.265 66.294,-1.644 72.651,-1.644 74.621,0.326 D50.2@74.621,8.087
X15B: C36.1 D46.2 P17.2 R94.2 | length 17.8
  Top Layer w0.5: R94.2@62.974,16.002 63.908,15.068 C36.1@63.908,13.081 63.731,12.904 63.731,9.299 65.071,7.96 D46.2@65.231,7.96
  Top Layer w1: D46.2@65.231,7.96 65.231,6.161 P17.2@69.995,1.397
X16A: C28.1 D38.2 P2.1 R81.2 | length 30.2
  Top Layer w0.5: R81.2@90.453,16.002 91.291,15.164 C28.1@91.291,13.081 91.155,12.945 91.155,9.383 92.494,8.044 D38.2@92.655,8.044
  Top Layer w1: P2.1@82.786,1.397 82.786,-0.61 83.82,-1.644 91.155,-1.644 92.655,-0.144 D38.2@92.655,8.044
X16B: C24.1 D34.2 P2.2 R66.2 | length 17.5
  Top Layer w0.5: R66.2@81.293,16.002 82.163,15.132 C24.1@82.163,13.081 82.011,12.929 82.011,9.383 83.35,8.044 D34.2@83.511,8.044
  Top Layer w1: D34.2@83.511,8.044 83.511,5.752 P2.2@87.866,1.397
X17A: C39.1 D49.2 P6.1 R105.2 | length 28
  Top Layer w0.5: R105.2@108.771,16.002 109.546,15.228 C39.1@109.546,13.081 109.446,12.981 109.446,9.51 110.785,8.171 D49.2@110.946,8.171
  Top Layer w1: P6.1@100.657,1.397 103.197,-1.143 108.276,-1.143 110.946,1.527 D49.2@110.946,8.171
X17B: C35.1 D45.2 P6.2 R93.2 | length 17.3
  Top Layer w0.5: R93.2@99.612,16.002 100.418,15.196 C35.1@100.418,13.081 100.299,12.962 100.299,9.51 101.638,8.171 D45.2@101.799,8.171
  Top Layer w1: D45.2@101.799,8.171 101.799,5.335 P6.2@105.737,1.397
X18A: C30.1 D40.2 P10.1 R83.2 | length 29.6
  Top Layer w0.5: R83.2@127.09,16.002 127.801,15.291 C30.1@127.801,13.081 127.701,12.981 127.701,9.383 129.04,8.044 D40.2@129.201,8.044
  Top Layer w1: P10.1@118.527,1.397 118.527,0.218 120.142,-1.397 126.836,-1.397 129.201,0.968 D40.2@129.201,8.044
X18B: C26.1 D36.2 P10.2 R70.2 | length 17.1
  Top Layer w0.5: R70.2@117.931,16.002 118.673,15.259 C26.1@118.673,13.081 118.573,12.981 118.573,9.383 119.913,8.044 D36.2@120.073,8.044
  Top Layer w1: D36.2@120.073,8.044 120.073,5.174 123.607,1.64 P10.2@123.607,1.397
X19A: C41.1 D51.2 P14.1 R107.2 | length 29.1
  Top Layer w0.5: R107.2@145.409,16.002 146.056,15.355 C41.1@146.056,13.081 146.056,9.6 147.739,7.917 D51.2@147.9,7.917
  Top Layer w1: P14.1@136.398,1.397 136.398,0.127 138.169,-1.644 142.446,-1.644 147.9,3.81 D51.2@147.9,7.917
X19B: C37.1 D47.2 P14.2 R95.2 | length 16.9
  Top Layer w0.5: R95.2@136.25,16.002 136.929,15.323 C37.1@136.929,13.081 136.855,13.008 136.855,9.14 137.824,8.171 D47.2@138.355,8.171
  Top Layer w1: D47.2@138.355,7.917 141.478,4.794 P14.2@141.478,1.397
pads on no net: J1.0 J2.0 K1.2 K2.2 K3.2 K4.2 K5.2 K6.2 K7.2 K8.2 K9.2 K10.2 K11.2 K12.2 K13.2 K14.2 K15.2 K16.2 U1.11 U1.14 U1.19 U1.20 U13.11 U13.14 U13.19 U13.20 U?.6

## Polygon pours and split planes (outlines as drawn)
GND on Top Layer "GND_L01_P060" (solid, remove dead copper, pour order 60): -8.89,131.699 -7.62,130.429 -7.62,-14.732 182.372,-14.732 182.88,-14.224 182.88,129.413
GND on Bottom Layer "GND_L02_P062" (solid, remove dead copper, pour order 62): -7.62,132.715 -7.62,-8.509 -5.588,-10.541 184.404,-10.541 184.404,138.303 182.626,140.081

## Keep-outs
Keep-Out Layer:
  the board outline again, w0.3

## Other copper
Bottom Layer:
  region: 5.93,49.53